# Altium PCB P-TK-05-2FC-A-MB(V1.1)-20171225.PcbDoc (part 1 of 3)
Units mm, origin at the board's own origin, x right, y up, seen from the top; angles counter-clockwise.
Board outline 82.48 x 84.99 mm, 2 copper layers (Top Layer, Bottom Layer); 89 components, 88 nets, 340 pads, 147 vias.
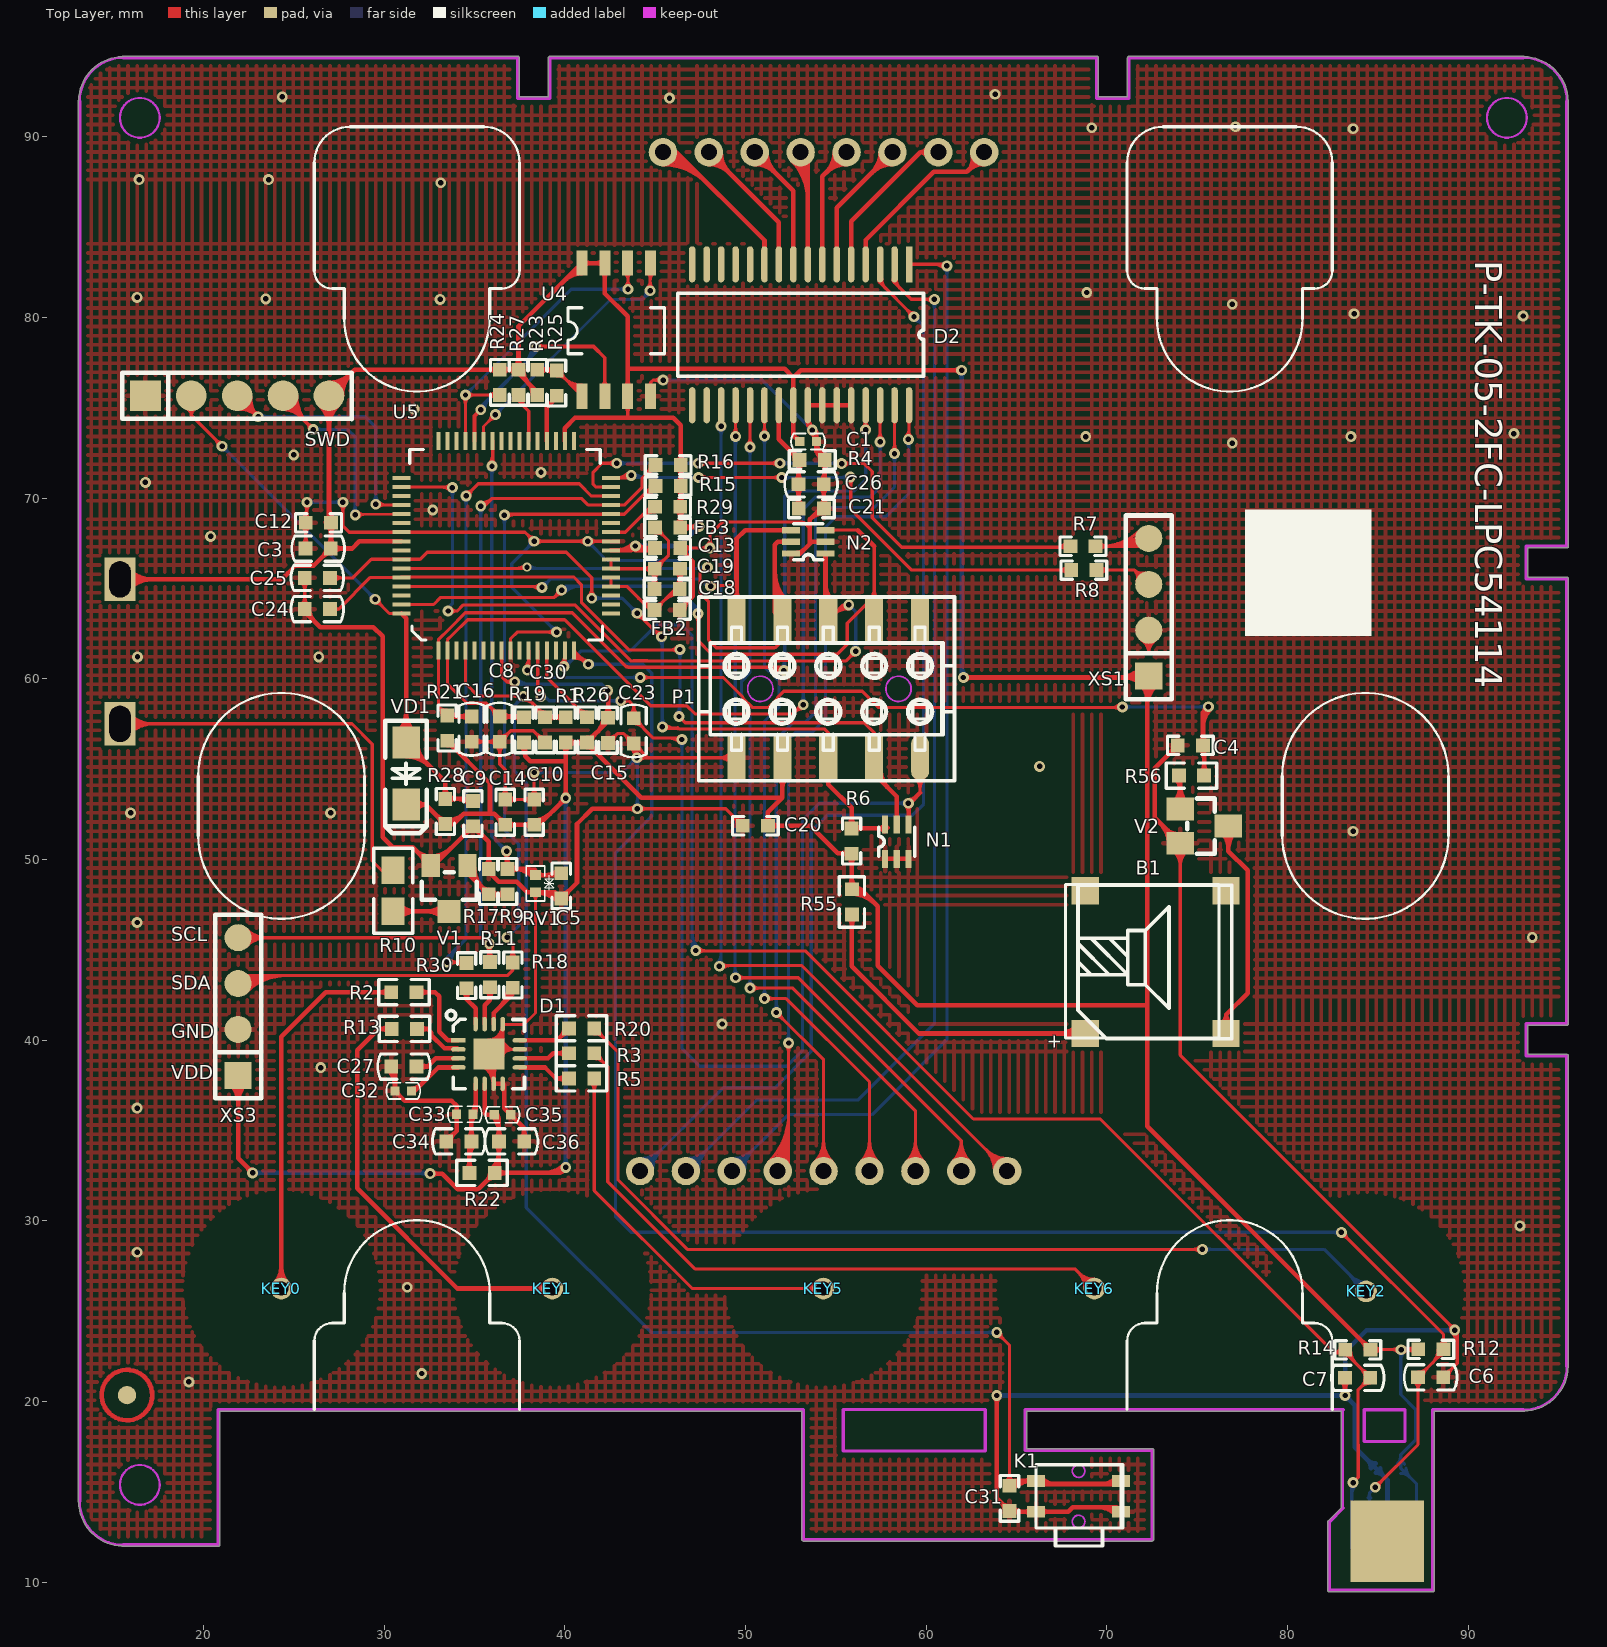
[diagram p0: Top Layer view]
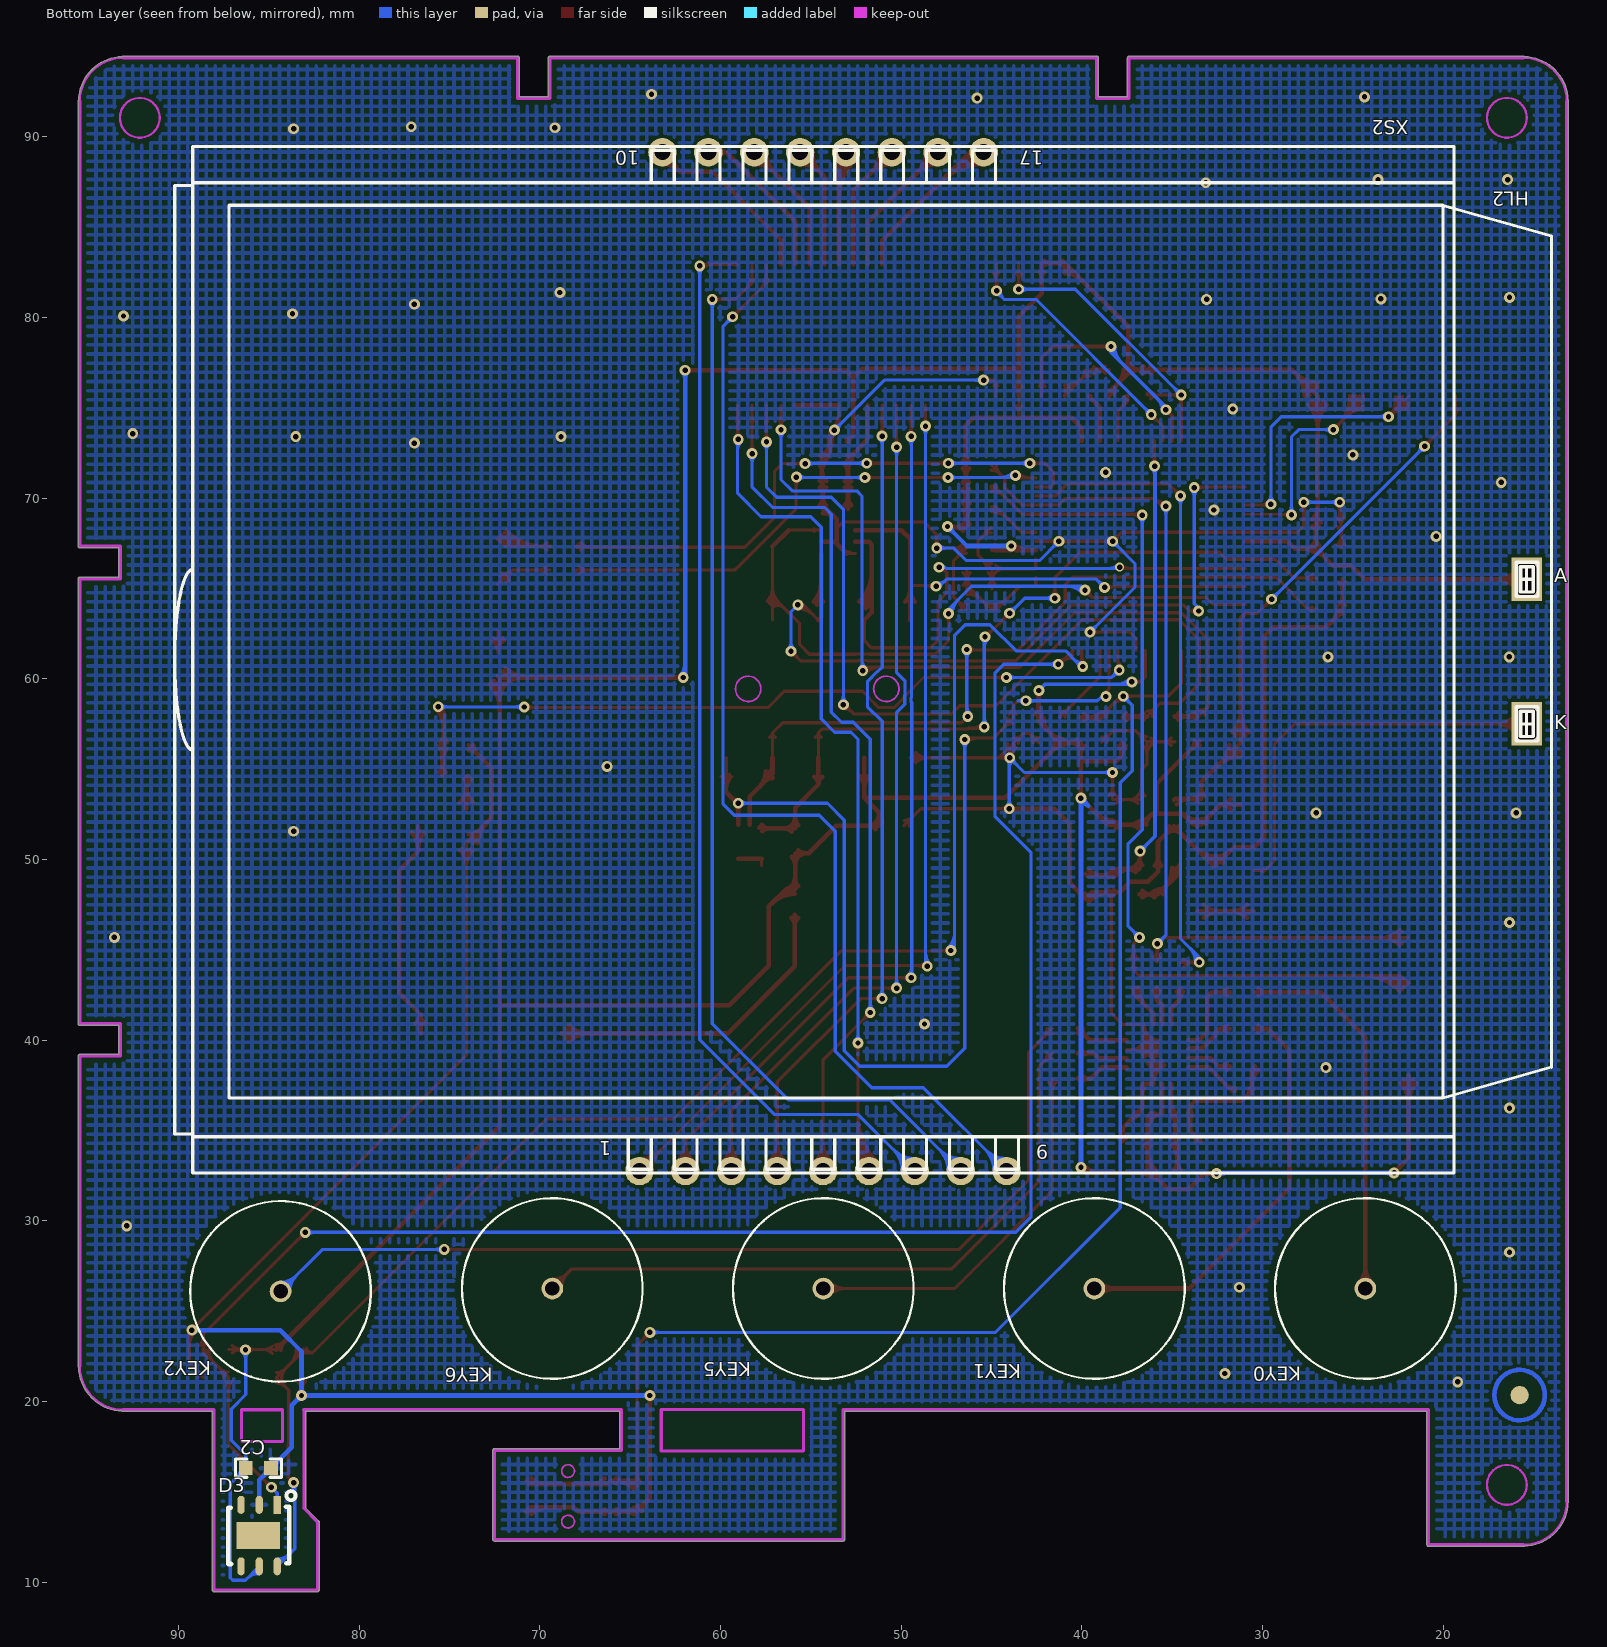
[diagram p1: Bottom Layer view, seen from below]

## Layer stack, top to bottom
Top Layer: signal copper 0.0356
Dielectric: core 0.32, FR-4, Dk 4.8
Bottom Layer: signal copper 0.0356

## Board outline
15.497,12.004 cw(c15.56,14.468) 13.097,14.404 cw(c13.16,14.467) 13.071,14.467 13.071,25.311 cw(c13.16,25.311) 13.076,25.341 cw(c13.16,25.37) 13.071,25.37 13.071,91.967 cw(c13.16,91.967) 13.097,92.031 cw(c15.56,91.967) 15.497,94.431 cw(c15.56,94.367) 15.56,94.457 37.386,94.457 cw(c37.386,94.367) 37.476,94.367 37.476,92.207 39.097,92.207 39.097,94.367 cw(c39.186,94.367) 39.186,94.457 69.434,94.457 cw(c69.434,94.367) 69.523,94.367 69.523,92.207 71.145,92.207 71.145,94.367 cw(c71.234,94.367) 71.234,94.457 93.06,94.457 cw(c93.06,94.367) 93.123,94.431 cw(c93.06,91.967) 95.523,92.03 cw(c95.46,91.967) 95.549,91.967 95.549,67.367 cw(c95.46,67.367) 95.548,67.35 cw(c95.46,67.332) 95.549,67.332 cw(c95.46,67.332) 95.46,67.243 93.299,67.243 93.299,65.617 95.46,65.617 cw(c95.46,65.527) 95.549,65.527 95.549,40.917 cw(c95.46,40.917) 95.458,40.828 cw(c95.456,40.917) 95.456,40.828 93.299,40.828 93.299,39.207 95.456,39.207 cw(c95.456,39.117) 95.458,39.207 cw(c95.46,39.117) 95.549,39.117 95.549,21.94 cw(c95.46,21.94) 95.523,21.877 cw(c93.06,21.94) 93.123,19.477 cw(c93.06,19.54) 93.06,19.451 88.119,19.451 88.119,9.557 cw(c88.03,9.557) 88.03,9.468 82.31,9.468 cw(c82.31,9.557) 82.221,9.557 82.221,13.3 cw(c82.305,13.328) 82.242,13.391 82.963,14.111 82.962,19.451 65.567,19.451 65.567,17.391 72.51,17.391 cw(c72.51,17.302) 72.599,17.302 72.599,12.367 cw(c72.51,12.367) 72.507,12.278 53.21,12.278 cw(c53.21,12.367) 53.121,12.367 53.121,19.458 20.899,19.458 20.899,12.067 cw(c20.81,12.067) 20.81,11.978 15.56,11.978 cw(c15.56,12.067)

## Design rules (kind name [scope] priority, off if disabled: settings)
Clearance keepout [OnLayer('Keep-Out Layer') vs InNet('GND')] p1: gap=0.254
Clearance Clearance_10 [All] p2: gap=0.178
Clearance Clearance_2 [InNet('KEY0') vs InNet('KEY1')] p3: gap=1.27
Clearance Clearance_3 [InNet('KEY6') vs InNet('COM0')] p4: gap=1.27
Clearance Clearance_4 [InNet('KEY6') vs InNet('GND')] p5: gap=1.27
Clearance Clearance_5 [InNet('KEY5') vs InNet('GND')] p6: gap=1.27
Clearance Clearance_6 [InNet('KEY2') vs InNet('GND')] p7: gap=1.27
Clearance Clearance_7 [InNet('KEY1') vs InNet('GND')] p8: gap=1.27
Clearance Clearance_8 [InNet('KEY0') vs InNet('GND')] p9: gap=1.27
Clearance Clearance_9 [InNet('KEY5') vs InNet('SEG04')] p10: gap=1.27
Clearance [All] p11: gap=0.203
ComponentClearance [All] p1: gap=0 collisioncheckmode=3 verticalgap=0 showdistances=FALSE
FabricationTestpoint [(IsPad And (OnTopLayer Or OnBottomLayer))] p1: side=3 testpointundercomponent=TRUE minsize=1.016 maxsize=2.54 preferedsize=1.524 minholesize=0 maxholesize=1.016 preferedholesize=0.813 testpointgrid=0.025 allowsidetop=TRUE allowsidebottom=TRUE usegrid=TRUE gridtolerance=0
HoleSize [All] p1: absolutevalues=TRUE maxlimit=25.4 minlimit=0.025 maxpercent=80.000 minpercent=20.000
HoleToHoleClearance [All] p1: gap=0 allowstackedmicrovias=TRUE
MinimumSolderMaskSliver [All] p1: minsoldermaskwidth=0
PolygonConnect PolygonConnect_2 [InNet('GND') vs (InPadClass('All Pads'))] p1: connectstyle=Relief reliefconductorwidth=0.254 reliefentries=4 polygonreliefangle="90 Angle"
PolygonConnect [All] p2: connectstyle=Direct reliefconductorwidth=0.254 reliefentries=4 polygonreliefangle="90 Angle"
RoutingVias [All] p1: holewidth=0.3 width=0.6 viastyle="Through Hole" minholewidth=0 minwidth=0 maxholewidth=25.4 maxwidth=25.4
SilkToSilkClearance [All] p1: silktosilkclearance=0
SilkscreenOverComponentPads [IsPad] p1: minsilkscreentomaskgap=0
SolderMaskExpansion [All] p1: expansion=0.102
Width [All] p1: maxlimit=12.7 minlimit=0.025 preferedwidth=0.127 minimp=50.000000 maximp=50.000000 favimp=50.000000
21 further rules are at their usual default settings.

## Components (designator, comment, footprint, x,y, rotation, side; value= is the part's Value field where it differs from the comment)
B1 "HU8540-SMD" HU8540 68.807,40.368 r0 top locked
C1 "100nF" C0402 53.924,73.127 r180 top
C2 "100nF" 0603C 85.575,16.313 r180 bottom
C3 "10uF" C0603 25.654,67.208 r0 top
C4 "1nF" 0603C 74.625,56.312 r180 top
C5 "1nF" 0603C 39.802,48.539 r270 top
C6 "22pF" C0603 88.621,21.336 r180 top
C7 "22pF" C0603 84.582,21.311 r180 top
C8 "22pF" C0603 36.398,56.515 r90 top
C9 "100nF" 0603C 34.918,52.538 r270 top
C10 "104P" 0603C 38.305,52.615 r270 top
C12 "100nF" 0603C 26.365,68.631 r180 top
C13 "100nF" 0603C 45.695,67.234 r0 top
C14 "100nF" 0603C 36.705,52.615 r90 top
C15 "100nF" 0603C 42.393,57.15 r270 top
C16 "22pF" C0603 34.849,56.515 r90 top
C18 "104P" 0603C 45.669,64.973 r180 top
C19 "104P" 0603C 45.685,66.087 r180 top
C20 "22uF" 0603C 50.546,51.867 r180 top
C21 "100nF" 0603C 53.645,69.418 r0 top
C23 "22pF" C0603 43.815,57.81 r270 top
C24 "22pF" C0603 27,63.856 r180 top
C25 "22pF" C0603 27,65.583 r180 top
C26 "22pF" C0603 54.331,70.764 r180 top
C27 "2.2nF" C0603 31.799,38.539 r180 top
C30 "1nF" 0603C 38.913,57.175 r270 top
C31 "100nF" 0603C 64.616,14.638 r270 top
C32 "100nF" C0402 30.605,37.193 r0 top
C33 "100nF" C0402 34.011,35.898 r0 top
C34 "1uF" C0603 34.832,34.396 r180 top
C35 "100nF" C0402 37.008,35.872 r180 top
C36 "1uF" C0603 36.356,34.396 r0 top
D1 "CY8CMBR3108" "QFN16 - 3108" 34.212,39.987 r0 top
D2 "BU9796" SSOP-32 59.053,82.938 r90 top locked
D3 "HDC1080" DFN6-1 84.534,14.281 r270 bottom
FB2 "FB" 0603L 45.669,63.805 r0 top
FB3 "FB" 0603L 45.695,68.377 r180 top
HL2 "JSD490W" JSD490W-K 15.385,65.466 r180 bottom locked
K1 "TD-26XU-Z" TD-26XU-Z 66.089,13.002 r0 top locked
KEY0 "弹簧-镀镍线-h9-n10-d0.3-D6" SPRING 24.31,26.253 r0 top locked
KEY1 "弹簧-镀镍线-h9-n10-d0.3-D6" SPRING 39.31,26.253 r0 top locked
KEY2 "弹簧-镀镍线-h9-n10-d0.3-D6" SPRING 84.352,26.093 r0 top locked
KEY5 "弹簧-镀镍线-h9-n10-d0.3-D6" SPRING 54.31,26.253 r0 top locked
KEY6 "弹簧-镀镍线-h9-n10-d0.3-D6" SPRING 69.31,26.253 r0 top locked
N1 "LESDA6V1W6" SOT323-6L 57.728,50.029 r90 top
N2 "LESDA6V1W6" SOT323-6L 54.432,66.929 r180 top
P1 "2*5P-SMT" "2*5  2.54 SMT" 59.663,55.633 r180 top locked
R1 "10K" 0603R 40.056,57.175 r90 top
R2 "560Ω" R0603 31.799,42.654 r180 top
R3 "560Ω" R0603 40.232,39.276 r0 top
R4 "10K" 0603R 53.696,72.111 r0 top
R5 "560Ω" R0603 40.232,37.879 r0 top
R6 "10K" 0603R 55.873,51.02 r90 top
R7 "100Ω" 0603R 68.682,67.335 r180 top
R8 "100Ω" 0603R 68.732,66.015 r0 top
R9 "1K" 0603R 36.828,48.775 r90 top
R10 "1K" R0805 30.504,47.124 r90 top
R11 "100Ω" 0603R 35.858,43.62 r270 top
R12 "10K" 0603R 87.935,22.885 r0 top
R13 "560Ω" R0603 31.825,40.622 r180 top
R14 "10K" 0603R 83.896,22.86 r180 top
R15 "10K" 0603R 45.72,70.663 r0 top
R16 "10K" 0603R 45.72,71.831 r0 top
R17 "10K" 0603R 35.787,48.775 r90 top
R18 "100Ω" 0603R 37.127,43.602 r90 top
R19 "10K" 0603R 37.744,57.175 r270 top
R20 "560Ω" R0603 40.232,40.647 r0 top
R21 "10K" 0603R 33.491,57.273 r270 top
R22 "0Ω" R0603 36.119,32.653 r180 top
R23 "100K" 0603R 38.481,76.403 r270 top
R24 "100K" 0603R 36.398,76.403 r90 top
R25 "300" 0603R 39.55,76.369 r90 top
R26 "10K" 0603R 41.224,57.175 r270 top
R27 "10K" 0603R 37.44,76.403 r90 top
R28 "1K" 0603R 33.391,52.654 r270 top
R29 "10K" 0603R 45.695,69.52 r0 top
R30 "100" 0603R 34.563,43.57 r90 top
R55 "150Ω" R0603 55.89,46.95 r90 top
R56 "5.1K" R0603 73.989,54.643 r0 top
RV1 "UAD8C05L01(SOD882)" SOD-882 38.379,48.184 r90 top
SWD "PH-1*5P" SIP5 16.789,75.667 r0 top
U4 "25P80/25P16" SO8W 42.85,79.324 r0 top
U5 "LPC54114J256BD64" LQFP64 36.754,67.361 r0 top
V1 "CS3400(SOT-23)" SOT-23-MOS 33.603,48.267 r180 top
V2 "BC817(SOT23)" SOT-23 76.732,51.849 r270 top
VD1 "LL4148(LL-34)" LL-34 31.217,56.464 r270 top
XS1 "CON-XH-4A" SIP4 72.322,60.146 r90 top
XS2 "ZY17162T" ZY17162T 64.484,32.756 r180 bottom locked
XS3 "CON-XH-4A" SIP4 21.922,38.05 r90 top (schematic designator XS1)

## Footprints (in the part's own frame and the unit in brackets; to place one, negate y for a bottom-side part, rotate by r counter-clockwise, add the part's x,y. Pads: shape width x height; smd on the part's side, far side on the other; paste and mask are expansions set on the pad)
"2*5  2.54 SMT" [mm]
  oval 1x2.5 smd: 1(0,0)
  rect 1x2.5 smd: 2(0,-7.62) 3(2.54,0) 4(2.54,-7.62) 5(5.08,0) 6(5.08,-7.62) 7(7.62,0) 8(7.62,-7.62) 9(10.16,0) 10(10.16,-7.62)
  Keep-Out Layer circle w0.102: c8.839,-3.81 r0.7
  Keep-Out Layer circle w0.102: c1.194,-3.81 r0.7
  silkscreen extent -1.9,-8.89 12.24,1.27
0603C [mil]
  rect 30x30 smd: 1(27.5,0) 2(-27.5,0)
  silkscreen extent -50,-20 50,20
0603L [mil]
  rect 30x30 smd: 1(27.5,0) 2(-27.5,0)
  silkscreen extent -50,-20 50,20
0603R [mil]
  rect 30x30 smd: 1(27.5,0) 2(-27.5,0)
  silkscreen extent -50,-20 50,20
C0402 [mil]
  rect 20x20 smd: 1(0,0) 2(36,0)
  silkscreen extent -19,-18 55,17, body extent -1,-10 38,10, height 19
C0603 [mil]
  rect 30x30 smd: 1(0,0) 2(55,0)
  silkscreen extent -30,-27 85,28, body extent -4,-16 59,16, height 35
DFN6-1 [mm]
  rect 1.5x2.4 smd: 0(1.702,-1.041)
  rect 1x0.4 smd: 1(0,0)
  oval 1x0.4 smd: 2(0,-1) 3(0,-2) 4(3.404,-2) 5(3.404,-1) 6(3.404,0)
  silkscreen extent -0.76,-2.72 3.28,1.02
HU8540 [mm]
  rect 1.5x1.5 smd: 1(0,0) 2(7.8,0) ""(0,7.9) ""(7.8,7.9)
  silkscreen extent -0.4,-0.3 8.1,8.2, body extent -0.51,-0.38 8.13,8.25, height 3
JSD490W-K [mm]
  rect 1.7x2.4 hole 1.2 slot 2 at 90 deg: A(0,0.037) K(0,-7.963)
  silkscreen extent -71.83,-28.66 1.37,20.74
LL-34 [mil]
  rect 70x60 smd: A(0,0) K(135,0)
  silkscreen extent -48,-45 197,45, body extent 0,-29 138,30, height 61
LQFP64 [mm]
  rect 0.22x1 smd: 1(-3.75,-5.8) 2(-3.25,-5.8) 3(-2.75,-5.8) 4(-2.25,-5.8) 5(-1.75,-5.8) 6(-1.25,-5.8) 7(-0.75,-5.8) 8(-0.25,-5.8) 9(0.25,-5.8) 10(0.75,-5.8) 11(1.25,-5.8) 12(1.75,-5.8) 13(2.25,-5.8) 14(2.75,-5.8) 15(3.25,-5.8) 16(3.75,-5.8) 33(3.75,5.8) 34(3.25,5.8) 35(2.75,5.8) 36(2.25,5.8) 37(1.75,5.8) 38(1.25,5.8) 39(0.75,5.8) 40(0.25,5.8) 41(-0.25,5.8) 42(-0.75,5.8) 43(-1.25,5.8) 44(-1.75,5.8) 45(-2.25,5.8) 46(-2.75,5.8) 47(-3.25,5.8) 48(-3.75,5.8)
  rect 1x0.22 smd: 17(5.8,-3.75) 18(5.8,-3.25) 19(5.8,-2.75) 20(5.8,-2.25) 21(5.8,-1.75) 22(5.8,-1.25) 23(5.8,-0.75) 24(5.8,-0.25) 25(5.8,0.25) 26(5.8,0.75) 27(5.8,1.25) 28(5.8,1.75) 29(5.8,2.25) 30(5.8,2.75) 31(5.8,3.25) 32(5.8,3.75) 49(-5.8,3.75) 50(-5.8,3.25) 51(-5.8,2.75) 52(-5.8,2.25) 53(-5.8,1.75) 54(-5.8,1.25) 55(-5.8,0.75) 56(-5.8,0.25) 57(-5.8,-0.25) 58(-5.8,-0.75) 59(-5.8,-1.25) 60(-5.8,-1.75) 61(-5.8,-2.25) 62(-5.8,-2.75) 63(-5.8,-3.25) 64(-5.8,-3.75)
  silkscreen extent -5.33,-5.21 5.33,5.33
"QFN16 - 3108" [mm]
  rect 0.8x0.25 smd: 1(-0.1,0)
  oval 0.8x0.25 smd: 2(-0.1,-0.5) 3(-0.1,-1) 4(-0.1,-1.5) 9(3.3,-1.5) 10(3.3,-1) 11(3.3,-0.5) 12(3.3,0)
  oval 0.25x0.8 smd: 5(0.85,-2.4) 6(1.35,-2.4) 7(1.85,-2.4) 8(2.35,-2.4) 13(2.35,0.9) 14(1.85,0.9) 15(1.35,0.9) 16(0.85,0.9)
  rect 1.7x1.7 smd: 17(1.6,-0.75)
  silkscreen extent -0.76,-2.68 3.56,1.65
R0603 [mil]
  rect 30x30 smd: 1(0,0) 2(55,0)
  silkscreen extent -27,-27 83,28, body extent -4,-16 58,15, height 18
R0805 [mil]
  rect 60x50 smd: 1(0,0) 2(90,0)
  silkscreen extent -48,-42 137,43, body extent 5,-25 84,25, height 22
SIP4 [mm]
  rect 1.5x1.5 smd: 1(0,0)
  round 1.5 smd: 2(2.54,0) 3(5.08,0) 4(7.62,0)
  silkscreen extent -1.27,-1.27 8.89,1.27
SIP5 [mm]
  rect 1.7x1.7 smd: 1(0,0)
  round 1.7 smd: 2(2.54,0) 3(5.08,0) 4(7.62,0) 5(10.16,0)
  silkscreen extent -1.27,-1.3 11.43,1.27
SO8W [mil]
  rect 24x55 smd: 1(-75,-145) 2(-25,-145) 3(25,-145) 4(75,-145) 5(75,145) 6(25,145) 7(-25,145) 8(-75,145)
  silkscreen extent -105,-52 105,48
SOD-882 [mm]
  rect 0.55x0.6 smd: 1(0,0) 2(0.95,0)
  silkscreen extent -0.48,-1 1.45,0.51
SOT323-6L [mm]
  rect 1x0.35 smd: 1(0,0) 2(0,-0.65) 3(0,-1.3) 4(1.9,-1.3) 5(1.9,-0.65) 6(1.9,0)
  silkscreen extent 0.15,-1.65 1.75,0.35
SOT-23 [mil]
  rect 50x60 smd: B(-37.5,-105) C(0,0) E(37.5,-105)
  silkscreen extent -60,-90 60,-30
SOT-23-MOS [mil]
  rect 50x50 smd: D(0,45)
  rect 40x50 smd: G(-40,-55) S(40,-55)
  silkscreen extent -60,-40 60,20, body extent -57,-59 57,51, height 47
SPRING [mm]
  round 1.2 hole 0.8: 1(0,0)
SSOP-32 [mm]
  rect 2x0.36 smd: 1(0,0)
  oval 2x0.36 smd: 2(0,0.8) 3(0,1.6) 4(0,2.4) 5(0,3.2) 6(0,4) 7(0,4.8) 8(0,5.6) 9(0,6.4) 10(0,7.2) 11(0,8) 12(0,8.8) 13(0,9.6) 14(0,10.4) 15(0,11.2) 16(0,12) 17(-7.8,12) 18(-7.8,11.2) 19(-7.8,10.4) 20(-7.8,9.6) 21(-7.8,8.8) 22(-7.8,8) 23(-7.8,7.2) 24(-7.8,6.4) 25(-7.8,5.6) 26(-7.8,4.8) 27(-7.8,4) 28(-7.8,3.2) 29(-7.8,2.4) 30(-7.8,1.6) 31(-7.8,0.8) 32(-7.8,0)
  silkscreen extent -6.2,-0.8 -1.6,12.8
TD-26XU-Z [mm]
  rect 1x0.65 smd: 1(0,2.6) 2(0,0.9) 3(4.7,2.6) 4(4.7,0.9)
  Keep-Out Layer circle w0.102: c2.35,0.35 r0.35
  Keep-Out Layer circle w0.102: c2.35,3.15 r0.35
  silkscreen extent 0,-1 4.7,3.5
ZY17162T [mil]
  round 62 hole 35: 1(0,0) 2(100,0) 3(200,0) 4(300,0) 5(400,0) 6(500,0) 7(600,0) 8(700,0) 9(800,0) 10(50,2220) 11(150,2220) 12(250,2220) 13(350,2220) 14(450,2220) 15(550,2220) 16(650,2220) 17(750,2220)
  silkscreen extent -1013,-4 1775,2232

## Part data
B1: library part 10112020002, "扬声器"
C1 C2 C9 C12 C13 C14 C15 C21 C31 C32 C33 C35: library part 10103020007, "无极性电容"
C3: library part 10103030010, "无极性电容"
C4 C5 C30: library part 10103020004, "无极性电容"
C6 C7 C8 C16 C23 C24 C25 C26: library part 10103030023, "无极性电容"
C10 C18 C19: library part CAP
C20: library part 10103040014, "无极性电容"
C27: library part 10103030025, "无极性电容"
C34 C36: library part 10103030008, "无极性电容"
D1: library part 10109010004, "微控制器"
D2: library part 10109140005
D3: library part 10117000017, "温湿度传感器"
HL2: library part 10111040012, "LED-发光管类"
K1: library part 10121000033
KEY0 KEY1 KEY2 KEY5 KEY6: library part 10302000003, "弹簧"
N1 N2: library part 10109090005, "IC-其它类集成电路"
P1: library part 10118020054
R1 R4 R6 R12 R14 R15 R16 R17 R19 R21: library part 10102010006, "电阻"
R2 R3 R5 R13 R20: library part 10102020127, "电阻"
R7 R8: library part 10102010003, "@"
R9 R28: library part 10102010005, "电阻"
R10: library part 10102030005, "电阻"
R11 R18: library part 10102010003, "电阻"
R22: library part 10102020001, "电阻"
R23 R24 R25 R30: library part RES3
R26 R27 R29: library part RES1
R55: library part 10102020026, "电阻"
R56: library part 10102020116, "电阻"
RV1: library part 10105050017, "TVS-TVS管"
SWD: library part 10118010013, "@"
U4: library part M25PXX(8)
U5: library part LPC5411X_LQFP64
V1: library part 10107050002, "N沟道绝缘栅场效应管_增强型"
V2: library part 10107010003, "NPN三极管"
VD1: library part 10105040022, "DIODE-整流二极管类"
XS1 XS3: library part 10118030031, "@"
XS2: library part 10116020006

## Free pads (board coordinates)
  round 1.016 smd far side: 0(15.772,20.353)
  rect 4.064x4.5 smd: 0(85.51,12.267)
  round 1.016 smd: 1(15.772,20.353)
  round 2.54 on Bottom Solder: 2(15.772,20.353)
  round 2.54 on Top Solder: 3(15.772,20.353)

## Via types
v1: diameter 0.6, hole 0.3, Top Layer to Bottom Layer, tented both sides, 146 vias
v2: diameter 0.5, hole 0.3, Top Layer to Bottom Layer, tented both sides, 1 vias

## Nets (pads, with @x,y where several pads share a name; then routed paths per layer and width w, separated by ;. In a path a pad name is that pad's centre, name@x,y a point inside that pad or via, vN(x,y) a via of type N, cw(c..) or ccw(c..) an arc to the next point about the centre after c; other vN are vias at no path point)
+5V: P1.2
BACKLIGHT: C5.2 R9.1 RV1.2 U5.42 | length 47.3
  Top Layer w0.178: R9.1@36.78,49.522 36.828,49.522 37.991,49.522 38.039,49.474 ; R9.1@36.828,49.474 38.039,49.474 ; R9.1@36.909,49.393 cw(c37.221,49.081) 37.221,49.522 ; R9.1@37.084,49.474 cw(c37.084,47.864) RV1.2@38.223,49.002 ; 37.417,49.522 cw(c37.417,50.062) 37.035,49.68 ccw(c37.534,50.179) 37.534,49.474 ccw(c37.534,48.769) 37.035,49.267 cw(c37.65,48.652) 37.65,49.522 ; 37.514,49.474 cw(c37.514,48.293) RV1.2@38.349,49.128 ; 37.943,49.474 cw(c37.943,48.722) RV1.2@38.474,49.254 ; 38.019,49.494 cw(c37.659,49.134) RV1.2@38.168,49.134 ; RV1.2@38.275,49.238 38.039,49.474 ; RV1.2@38.279,49.291 ccw(c38.162,49.474) 38.379,49.474 ; RV1.2@38.379,49.134 38.379,49.474 ; RV1.2@38.48,49.291 cw(c38.597,49.474) 38.379,49.474 ; C5.2@39.698,49.134 39.802,49.134 C5.2@39.802,49.238 ; 38.039,49.474 38.379,49.474 ; 38.079,49.434 ccw(c38.354,49.709) RV1.2@38.354,49.32 ; 38.079,49.434 ccw(c38.354,49.709) RV1.2@38.354,49.32 ; 38.079,49.434 ccw(c38.354,49.709) RV1.2@38.354,49.32 ; 38.027,49.486 cw(c37.686,49.145) 38.168,49.137 ccw(c37.686,49.145) 38.027,49.486
  Top Layer w0.2: v1@35.832,71.915 ccw(c35.418,72.329) 36.004,72.329 ; v1(35.974,71.774) 36.004,71.774 U5.42@36.004,73.161 ; 36.004,72.184 ccw(c36.384,72.184) v1@36.115,71.915 ; R9.1@36.63,49.672 ccw(c36.267,50.035) 36.78,50.035 ; v1@36.639,50.319 cw(c36.297,49.977) 36.78,49.977 cw(c37.263,49.977) v1@36.921,50.319 ; R9.1@36.78,49.522 v1(36.78,50.46) ; v1@36.78,50.269 ccw(c37.624,50.269) R9.1@37.027,49.672
  Top Layer w0.254: R9.1@36.828,49.474 38.039,49.474 RV1.2@38.275,49.238 ; R9.1@37.008,49.294 cw(c37.442,48.861) 37.442,49.474 cw(c37.442,50.087) R9.1@37.008,49.653 ; R9.1@37.176,49.474 cw(c37.176,47.956) RV1.2@38.25,49.029 ; 37.79,49.474 cw(c37.79,48.569) RV1.2@38.429,49.209 ; 38.084,49.429 cw(c37.789,49.134) RV1.2@38.206,49.134 ; RV1.2@38.144,49.369 ccw(c38.354,49.579) RV1.2@38.354,49.282 ; RV1.2@38.379,49.134 C5.2@39.698,49.134 ; RV1.2@38.509,49.029 cw(c38.762,48.777) 38.762,49.134 cw(c38.762,49.491) RV1.2@38.509,49.238 ; 38.937,49.134 ccw(c38.937,50.102) C5.2@39.622,49.418
  Bottom Layer w0.2: v1@35.832,71.632 cw(c35.543,71.343) 35.952,71.343 ; 35.952,71.239 cw(c36.509,71.239) v1@36.115,71.632 ; v1(35.974,71.774) 35.952,71.752 35.952,51.288 v1(36.78,50.46) ; v1@36.58,50.46 ccw(c36.097,50.46) 36.439,50.801 ccw(c36.78,51.143) v1@36.78,50.66
BCKI: U5.51
BCKO: U5.41
BUZZER: C4.2 R56.2 U5.11 | length 55.1
  Top Layer w0.178: v1@37.781,60.629 ccw(c37.242,61.168) U5.11@38.004,61.168 ; v1(37.93,60.48) 37.95,60.48 v1@37.952,60.48 ; v1@37.949,60.426 v1@37.952,60.48 ; 38.004,60.811 ccw(c38.261,60.811) v1@38.079,60.629 ; U5.11@38.004,61.561 38.004,60.494 37.99,60.48 v1@37.952,60.48 ; v1(44.18,60.07) 48.767,60.07 49.865,58.971 49.865,58.935 50.394,58.406 51.254,58.406 51.782,58.935 51.782,58.971 52.123,59.312 56.468,59.312 57.374,58.406 70.826,58.406 v1(70.86,58.44) ; v1@44.329,59.921 cw(c44.69,59.56) 44.69,60.07 cw(c44.69,60.58) v1@44.329,60.219 ; 70.268,58.406 ccw(c70.268,59.032) v1@70.711,58.589 ; 70.433,58.406 cw(c70.433,58.013) v1@70.711,58.291 ; C4.2@75.324,56.312 C4.2@75.592,56.312
  Top Layer w0.254: C4.2@75.144,56.132 cw(c74.561,55.549) 75.386,55.549 ; C4.2@75.144,56.491 ccw(c74.711,56.925) 75.324,56.925 ccw(c75.937,56.925) C4.2@75.503,56.491 ; R56.2@75.206,54.822 ccw(c74.772,55.256) 75.386,55.256 ccw(c75.999,55.256) R56.2@75.565,54.822 ; 75.324,57.317 cw(c76.753,57.317) v1@75.742,58.328 ; 75.324,57.93 cw(c76.14,57.93) v1@75.563,58.507 ; R56.2@75.386,54.643 75.386,56.25 C4.2@75.324,56.312 75.324,58.154 v1(75.62,58.45) ; 75.386,55.848 cw(c75.788,55.848) C4.2@75.503,56.132
  Bottom Layer w0.178: v1@37.93,60.269 cw(c37.93,59.711) 38.325,60.105 ; v1(37.93,60.48) v1@37.95,60.48 ; v1@37.99,60.48 v1@37.95,60.48 ; v1@38.141,60.48 ccw(c38.602,60.48) 38.276,60.154 ; v1@44.031,59.921 ccw(c43.67,59.56) 43.67,60.07 ccw(c43.67,60.58) v1@44.031,60.219 ; v1(44.18,60.07) 41.036,60.07 41.029,60.063 40.559,60.063 40.552,60.07 38.36,60.07 v1@37.95,60.48 ; v1(70.86,58.44) 75.61,58.44 v1(75.62,58.45) ; v1@71.009,58.291 cw(c71.37,57.93) 71.37,58.44 cw(c71.37,58.95) v1@71.009,58.589 ; 75.086,58.44 ccw(c75.086,58.984) v1@75.471,58.599 ; 75.135,58.44 cw(c75.135,57.965) v1@75.471,58.301
CAP_IRQ: R30.1 U5.30 | length 40.9
  Top Layer w0.178: v1(33.5,44.31) R30.1@34.521,44.31 ; v1@33.649,44.161 cw(c34.01,43.8) 34.01,44.31 cw(c34.01,44.82) v1@33.649,44.459 ; v1@33.757,44.31 cw(c33.757,43.462) R30.1@34.356,44.062 ; 33.959,44.31 ccw(c33.959,44.872) R30.1@34.356,44.475 ; R30.1@34.54,44.291 R30.1@34.563,44.268 ; v1@34.54,70.331 ccw(c34.54,70.841) 34.9,70.48 ccw(c35.261,70.12) v1@34.751,70.12 ; v1@34.549,70.111 v1(34.54,70.12) 35.21,70.79 40.8,70.79 41.479,70.111 U5.30@42.554,70.111
  Bottom Layer w0.178: v1(33.5,44.31) 33.5,44.58 34.54,45.62 v1(34.54,70.12) ; v1@33.533,44.31 cw(c34.265,44.31) 33.748,44.828 ; v1@33.711,44.31 cw(c34.873,44.31) 34.051,45.131 ; v1@34.391,69.971 cw(c34.03,69.61) 34.54,69.61 cw(c35.05,69.61) v1@34.689,69.971
COM0: D2.19 XS2.1 | length 61.3
  Top Layer w0.178: v1@48.504,74.133 ccw(c48.144,74.493) 48.653,74.493 ccw(c49.163,74.493) v1@48.803,74.133 ; v1@48.56,44.13 53.11,44.13 XS2.1@64.484,32.756 ; D2.19@48.589,74.254 cw(c48.433,74.098) 48.653,74.098 cw(c48.873,74.098) D2.19@48.718,74.254 ; v1(48.653,73.983) D2.19@48.653,75.138 ; v1@48.709,43.941 cw(c49.166,43.484) 49.166,44.13 ; v1@48.709,44.239 ccw(c48.973,44.503) 48.973,44.13 ; XS2.1@63.786,32.756 ccw(c62.1,32.756) 63.292,33.949 ccw(c64.484,35.141) XS2.1@64.484,33.455 ; XS2.1@63.964,32.756 ccw(c62.707,32.756) 63.596,33.645 ccw(c64.484,34.534) XS2.1@64.484,33.277 ; XS2.1@64.142,32.756 ccw(c63.314,32.756) 63.899,33.341 ccw(c64.484,33.927) XS2.1@64.484,33.099
  Bottom Layer w0.178: v1@48.411,44.239 ccw(c47.825,44.825) 48.653,44.825 ; v1@48.504,73.834 cw(c48.144,73.474) 48.653,73.474 cw(c49.163,73.474) v1@48.803,73.834 ; v1@48.536,44.114 ccw(c48.254,44.396) 48.653,44.396 ; v1@48.653,44.09 v1(48.653,73.983)
  other v1: 48.56,44.09
COM1: D2.20 XS2.2 | length 59
  Top Layer w0.178: v1@49.304,73.563 ccw(c48.944,73.923) 49.453,73.923 ccw(c49.963,73.923) v1@49.603,73.563 ; D2.20@49.389,74.254 cw(c49.233,74.098) 49.453,74.098 cw(c49.673,74.098) D2.20@49.518,74.254 ; v1(49.453,43.45) 52.923,43.45 61.944,34.429 ; v1(49.453,73.413) D2.20@49.453,75.138 ; v1@49.603,43.301 cw(c49.963,42.94) 49.963,43.45 cw(c49.963,43.96) v1@49.603,43.599 ; XS2.2@61.453,33.253 ccw(c60.291,34.429) 61.944,34.429 ; XS2.2@61.578,33.126 ccw(c60.712,34.003) 61.944,34.003 ccw(c63.177,34.003) XS2.2@62.31,33.126 ; XS2.2@61.703,33 ccw(c61.133,33.577) 61.944,33.577 ccw(c62.756,33.577) XS2.2@62.185,33 ; XS2.2@61.944,32.756 61.944,34.429 ; XS2.2@62.435,33.253 cw(c63.598,34.429) 61.944,34.429
  Bottom Layer w0.178: v1@49.304,43.599 ccw(c49.036,43.867) 49.415,43.867 ; v1@49.304,73.264 cw(c48.998,72.958) 49.431,72.958 ; 49.415,44.052 ccw(c50.055,44.052) v1@49.603,43.599 ; 49.431,72.849 cw(c50.018,72.849) v1@49.603,73.264 ; v1(49.453,43.45) 49.415,43.488 49.415,58.694 49.452,58.73 49.452,58.957 49.431,58.978 49.431,73.391 v1(49.453,73.413)
COM2: D2.21 XS2.3 | length 57.4
  Top Layer w0.178: v1@50.104,72.973 ccw(c49.744,73.333) 50.253,73.333 ccw(c50.763,73.333) v1@50.403,72.973 ; D2.21@50.189,74.254 cw(c50.033,74.098) 50.253,74.098 cw(c50.473,74.098) D2.21@50.318,74.254 ; v1(50.253,42.88) 52.62,42.88 59.404,36.096 XS2.3@59.404,32.756 ; v1(50.253,72.823) D2.21@50.253,75.138 ; v1@50.403,42.731 cw(c50.763,42.37) 50.763,42.88 cw(c50.763,43.39) v1@50.403,43.029 ; XS2.3@58.911,33.25 ccw(c57.718,34.442) 59.404,34.442 ccw(c61.091,34.442) XS2.3@59.898,33.25 ; XS2.3@59.036,33.124 ccw(c58.147,34.013) 59.404,34.013 ccw(c60.661,34.013) XS2.3@59.773,33.124 ; XS2.3@59.162,32.999 ccw(c58.577,33.584) 59.404,33.584 ccw(c60.232,33.584) XS2.3@59.647,32.999
  Bottom Layer w0.178: v1@50.104,43.029 ccw(c49.744,43.39) 50.253,43.39 ccw(c50.763,43.39) v1@50.403,43.029 ; v1@50.104,72.674 cw(c49.744,72.314) 50.253,72.314 cw(c50.763,72.314) v1@50.403,72.674 ; v1(50.253,42.88) 50.253,58.137 49.808,58.583 49.808,59.104 49.786,59.125 49.786,59.873 50.253,60.34 v1(50.253,72.823)
COM3: D2.22 XS2.4 | length 55.7
  Top Layer w0.178: v1@50.904,73.583 ccw(c50.544,73.943) 51.053,73.943 ccw(c51.563,73.943) v1@51.203,73.583 ; D2.22@50.989,74.254 cw(c50.833,74.098) 51.053,74.098 cw(c51.273,74.098) D2.22@51.118,74.254 ; v1(51.053,42.3) 52.25,42.3 56.864,37.686 XS2.4@56.864,32.756 ; v1(51.053,73.433) D2.22@51.053,75.138 ; v1@51.203,42.151 cw(c51.563,41.79) 51.563,42.3 cw(c51.563,42.81) v1@51.203,42.449 ; XS2.4@56.371,33.25 ccw(c55.178,34.442) 56.864,34.442 ccw(c58.551,34.442) XS2.4@57.358,33.25 ; XS2.4@56.496,33.124 ccw(c55.607,34.013) 56.864,34.013 ccw(c58.121,34.013) XS2.4@57.233,33.124 ; XS2.4@56.622,32.999 ccw(c56.037,33.584) 56.864,33.584 ccw(c57.692,33.584) XS2.4@57.107,32.999
  Bottom Layer w0.178: v1@50.904,42.449 ccw(c50.544,42.81) 51.053,42.81 ccw(c51.563,42.81) v1@51.203,42.449 ; v1@50.904,73.284 cw(c50.544,72.924) 51.053,72.924 cw(c51.563,72.924) v1@51.203,73.284 ; v1(51.053,42.3) 51.053,57.645 51.84,58.432 51.861,58.453 51.861,59.873 51.332,60.402 51.296,60.402 51.053,60.644 v1(51.053,73.433)
CTRL1: N2.1 P1.6 U5.50 | length 49.2
  Top Layer w0.178: U5.50@30.954,70.611 v1@33.749,70.611 ; 33.196,70.611 cw(c33.196,69.996) v1@33.631,70.431 ; 33.345,70.611 ccw(c33.345,71.015) v1@33.631,70.729 ; v1(33.54,63.75) 34.051,63.75 34.391,64.09 40.556,64.09 43.654,60.991 43.797,60.991 43.798,60.992 44.562,60.992 44.563,60.991 51.87,60.991 51.895,61.017 52.365,61.017 52.39,60.991 55.571,60.991 v1(56.1,61.52) ; v1@33.689,63.601 cw(c34.05,63.24) 34.05,63.75 cw(c34.05,64.26) v1@33.689,63.899 ; P1.6@54.583,63.253 55.42,64.09 ; P1.6@54.847,63.517 cw(c55.72,62.644) v1@55.72,63.879 ; 55.151,63.821 cw(c55.72,63.251) v1@55.72,64.057 ; v1@55.889,61.52 cw(c55.379,61.52) 55.74,61.16 cw(c56.1,60.799) v1@56.1,61.309
  Top Layer w0.254: P1.6@54.319,64.267 ccw(c54.046,64.54) 54.432,64.54 ; 54.432,64.655 ccw(c55.234,64.655) P1.6@54.667,64.087 ; 54.432,65.268 ccw(c55.847,65.268) P1.6@54.847,64.267 ; N2.1@54.432,66.929 54.432,63.404 P1.6@54.583,63.253
  Bottom Layer w0.178: v1(33.54,63.75) 33.54,63.91 33.78,64.15 v1(33.78,70.58) ; v1@33.631,70.431 cw(c33.27,70.07) 33.78,70.07 cw(c34.29,70.07) v1@33.929,70.431 ; v1(55.72,64.09) 56.1,63.71 v1(56.1,61.52) ; v1@55.951,61.669 ccw(c55.59,62.03) 56.1,62.03 ccw(c56.61,62.03) v1@56.249,61.669
CTRL2: N2.3 P1.4 U5.63 | length 50.2
  Top Layer w0.178: U5.63@30.954,64.111 32.741,64.111 33.131,64.501 ; 33.131,64.491 39.421,64.491 ; 39.421,64.501 v1(39.826,64.906) ; v1@39.615,64.906 cw(c39.106,64.906) 39.466,64.546 cw(c39.826,64.186) v1@39.826,64.695 ; v1@47.231,63.461 cw(c46.87,63.1) 47.38,63.1 cw(c47.89,63.1) v1@47.529,63.461 ; v1(47.38,63.61) 47.38,62.1 48.12,61.36 51.736,61.36 51.748,61.372 52.512,61.372 52.524,61.36 55.09,61.36 55.63,61.9 55.63,63.074 56.466,63.91 ; N2.3@54.432,68.229 56.221,68.229 ; N2.3@54.818,68.168 cw(c54.965,68.021) 54.965,68.229 cw(c54.965,68.437) N2.3@54.818,68.29 ; P1.4@56.832,64.294 ccw(c56.131,64.996) 57.123,64.996 ccw(c58.115,64.996) P1.4@57.414,64.294 ; P1.4@56.958,64.168 ccw(c56.56,64.567) 57.123,64.567 ccw(c57.686,64.567) P1.4@57.288,64.168 ; P1.4@57.123,63.253 57.123,64.567 ; 57.123,67.327 57.123,64.567 ; 56.466,63.91 57.123,64.567 ; 56.466,63.91 57.123,64.567 ; 57.123,64.567 ccw(c57.304,64.567) 57.249,64.395 cw(c57.304,64.567) 57.123,64.567 ; 57.123,64.567 cw(c56.941,64.567) 56.997,64.395 ccw(c56.941,64.567) 57.123,64.567 ; 56.472,63.917 cw(c56.805,63.584) 57.089,63.959 ccw(c56.805,63.584) 56.472,63.917 ; 56.617,64.061 cw(c56.93,63.748) 57.197,64.101 ccw(c56.93,63.748) 56.617,64.061
  Top Layer w0.254: 56.221,68.229 57.123,67.327
  Bottom Layer w0.178: v1(39.826,64.906) 40.04,65.12 46.11,65.12 47.38,63.85 v1(47.38,63.61) ; v1@39.85,64.883 cw(c40.423,64.31) 40.423,65.12 ; v1@39.976,64.757 cw(c40.852,63.881) 40.852,65.12 ; 46.85,64.38 cw(c46.08,63.61) v1@47.169,63.61 ; 47.153,64.077 cw(c46.687,63.61) v1@47.347,63.61
CTRL3: N2.4 P1.10 U5.61 | length 31.8
  Top Layer w0.178: U5.61@30.954,65.111 v1@38.739,65.111 ; 38.107,65.111 cw(c38.107,64.427) v1@38.591,64.911 ; 38.353,65.111 ccw(c38.353,65.447) v1@38.591,65.209 ; v1(38.74,65.06) v1@38.74,65.11 ; v1(48.07,65.12) 47.88,65.12 47.84,65.16 49.393,65.16 49.503,65.27 ; v1@48.219,64.971 cw(c48.676,64.514) 48.676,65.16 ; v1@48.219,65.269 ccw(c48.483,65.533) 48.483,65.16
  Top Layer w0.254: P1.10@49.239,64.267 ccw(c48.602,64.904) 49.503,64.904 ccw(c50.403,64.904) P1.10@49.767,64.267 ; P1.10@49.503,63.253 49.503,65.27 49.503,67.743 49.989,68.229 N2.4@52.532,68.229
  Bottom Layer w0.178: v1@38.74,65.271 ccw(c38.74,65.781) 39.1,65.42 ccw(c39.461,65.06) v1@38.951,65.06 ; v1@38.75,65.06 v1(38.74,65.06) 39.2,65.52 47.48,65.52 47.88,65.12 v1(48.07,65.12) ; 47.575,65.425 ccw(c47.875,65.725) v1@48.005,65.321 ; 47.781,65.219 ccw(c47.976,65.414) v1@48.06,65.152
CTRL4: N2.5 P1.8 U5.59 | length 37.3
  Top Layer w0.178: U5.59@30.954,66.111 v2@37.911,66.111 ; 37.353,66.111 ccw(c37.353,66.739) v2@37.797,66.295 ; v1(47.9,66.17) 47.789,66.17 47.484,65.866 47.484,64.746 47.96,64.27 47.96,62.14 48.384,61.716 51.588,61.716 51.601,61.728 51.648,61.728 52.043,62.123 P1.8@52.043,63.253
  Top Layer w0.254: 51.62,64.698 ccw(c52.738,64.698) P1.8@51.948,63.908 ; 51.62,65.312 ccw(c53.351,65.312) P1.8@52.127,64.087 ; 51.62,65.925 ccw(c53.965,65.925) P1.8@52.307,64.267 ; P1.8@52.043,63.253 51.62,63.676 51.62,67.42 51.779,67.579 N2.5@52.532,67.579
  Bottom Layer w0.178: v2@37.911,66.111 47.511,66.111 ; v2@38.025,66.295 ccw(c38.469,66.739) 38.469,66.111 ; 47.57,66.17 v1(47.9,66.17)
  other v2: 37.911,66.181